# Altium PCB 012_2N3906.PcbDoc
Units mil, origin at the board's own origin, x right, y up, seen from the top; angles counter-clockwise.
Board outline 500 x 500 mil, 2 copper layers (Top Layer, Bottom Layer); 3 components, 4 nets, 17 pads, 0 vias.
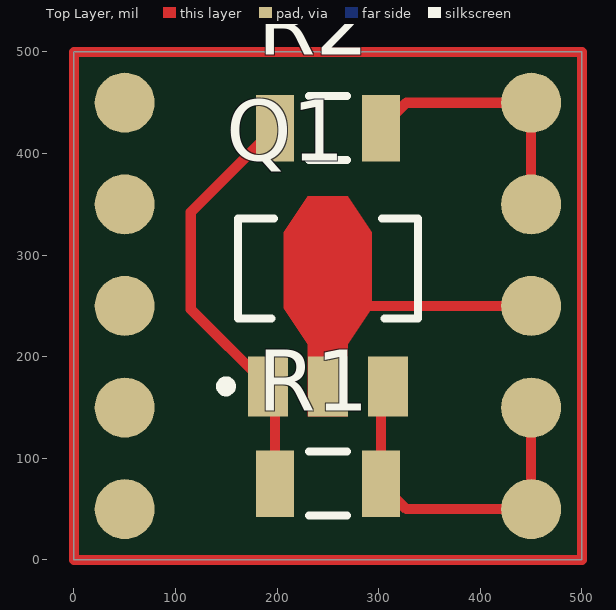
[diagram p0: Top Layer view]
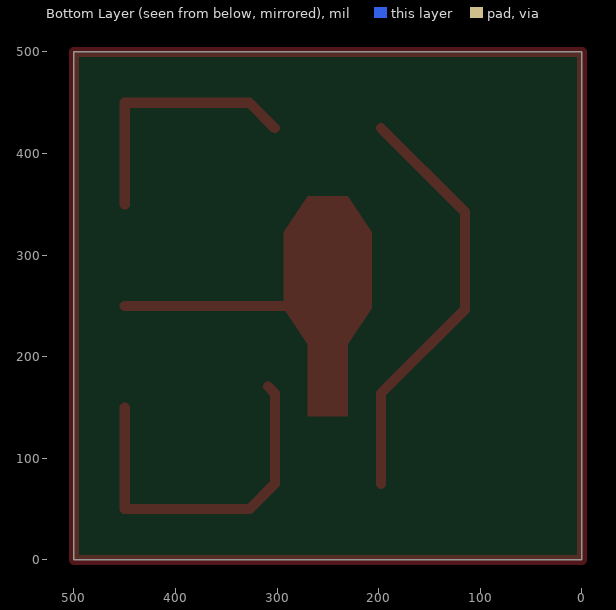
[diagram p1: Bottom Layer view, seen from below]

## Layer stack, top to bottom
Top Solder: solder mask 0.4, Solder Resist, Dk 3.5
Top Layer: signal copper 1.4
Dielectric 1: dielectric 12.6, FR-4, Dk 4.8
Bottom Layer: signal copper 1.4
Bottom Solder: solder mask 0.4, Solder Resist, Dk 3.5

## Board outline
0,0 0,500 500,500 500,0

## Design rules (kind name [scope] priority, off if disabled: settings)
Clearance [All] p1: gap=10 ignorepadtopadclearanceinfootprint=FALSE except(0: Arc-Hole Track-Hole SMDPad-Hole THPad-Hole Via-Hole Fill-Hole Poly-Hole Region-Hole Text-Hole)
PolygonConnect [All] p1: connectstyle=Relief reliefconductorwidth=10 reliefentries=4 polygonreliefangle="90 Angle" airgapwidth=10
RoomDefinition [InComponentClass('012_2N3906') vs False] p1: confinementstyle=ConfineIn formatcopy=TRUE lockcomponents=FALSE outline 0,0 500,0 500,500 0,500
RoomDefinition 012_2N3906 [InComponentClass('012_2N3906')] p2: confinementstyle=ConfineIn formatcopy=TRUE lockcomponents=FALSE outline 0,505 -65,505 0,505
RoutingVias [All] p1: holewidth=28 width=50 viastyle="Through Hole" minholewidth=28 minwidth=50 maxholewidth=28 maxwidth=50
SolderMaskExpansion [All] p1: expansion=4 istentingtop=FALSE
Width [All] p1: maxlimit=10 minlimit=10 preferedwidth=10
30 further rules are at their usual default settings.

## Components (designator, comment, footprint, x,y, rotation, side; value= is the part's Value field where it differs from the comment)
Q1 "2N3906" ONSC-SOT-89_PCP-1-3-419AU_V 250,285 r0 top
R1 "5K" FP-CRCW1206-e3-IPC_C 250,75 r180 top
R2 "5K" FP-CRCW1206-e3-IPC_C 250,425 r180 top

## Footprints (in the part's own frame and the unit in brackets; to place one, negate y for a bottom-side part, rotate by r counter-clockwise, add the part's x,y. Pads: shape width x height; smd on the part's side, far side on the other; paste and mask are expansions set on the pad)
FP-CRCW1206-e3-IPC_C [mil]
  rect 37.64x65.28 smd paste+0 mask+0: 1(-52.21,0) 2(52.21,0)
  silkscreen extent -19,-31 19,31, body extent -75,-38 75,38, height 10
ONSC-SOT-89_PCP-1-3-419AU_V [mm] "SOT89, 3-Leads, Body 4.5x2.5mm, Pitch 1.5mm"
  rect 1x1.5 smd: 1(-1.5,-2.9) 2(0,-2.9) 3(1.5,-2.9)
  Top Layer region: -0.5,-3.65 -0.5,-1.85 -1.1,-0.95 -1.1,0.95 -0.5,1.85 0.5,1.85 1.1,0.95 1.1,-0.95 0.5,-1.85 0.5,-3.65
  silkscreen extent -2.67,-3.02 2.25,1.3, body extent -2.25,-1.2 2.25,1.3, height 1.6

## Part data
Q1: library part CMP-1048-00974-1, "Bipolar Transistor, -50 V, -2 A, Low VCE(sat), PNP Single, 3-Pin SOT-89, Pb-Free, Tape and Reel", Manufacturer="On Semiconductor", PartNumber=2SB1123S-TD-E, ComponentLink1Description="Manufacturer URL", ComponentLink1URL=http://www.onsemi.com/, ComponentLink2Description=Datasheet, ComponentLink2URL=http://www.onsemi.com/pub_link/Collateral/EN1727-D.PDF, ComponentLink3Description="Package Specification", ComponentLink3URL=http://www.onsemi.com/pub_link/Collateral/ENA1087-D.PDF, IC Continuous (A)=-2, Mounting Technology="Surface Mount", PackageDescription="3-Pin Small Outline Transistor, Body 4.5 x 2.5 mm, Pitch 1.5 mm", PackageReference=SOT-89_PCP-1-3-419AU, PackageVersion="Rev. O, 04/2012", Packing="Tape and Reel", Polarity=PNP, RoHS=TRUE
R1 R2: library part CMP-2003-02034-2, "RES Thick Film, 1kΩ, 1%, 0.25W, 100ppm/°C, 1206", Case Code (Imperial)=1206, Case Code (Metric)=3216, Max Operating Temperature=155°C, Max Power Dissipation=250mW, Min Operating Temperature=-55°C, Package Quantity=10, Resistance=2.2kR, Temperature Coefficient=100ppm/°C, Tolerance=1%, Voltage Rating=200V, Case/Package=1206, Composition="Thick Film", Contact Plating=Tin, Depth=1.6mm, Features="Automotive AEC-Q200", Height=0.55mm, Lead Free="Lead Free", Length=3.2mm, Military Standard=Not, Number of Terminations=2, Packaging="Tape and Reel", Power Rating=250mW, Radiation Hardening=No, Termination=SMD/SMT, Voltage Rating (DC)=200V, Weight=0.000353oz, Width=1.6mm

## Free pads (board coordinates)
  round 59.06 smd paste+0 mask+0: 4(50,50) 4(50,150) 4(50,250) 4(50,350) 4(50,450) 4(450,50) 4(450,150) 4(450,250) 4(450,350) 4(450,450)

## Nets (pads, with @x,y where several pads share a name; then routed paths per layer and width w, separated by ;. In a path a pad name is that pad's centre, name@x,y a point inside that pad or via, vN(x,y) a via of type N, cw(c..) or ccw(c..) an arc to the next point about the centre after c; other vN are vias at no path point)
CTRL: pad.4@450,250 Q1.2 | length 214.5
  Top Layer w10: 250,285 285,250 pad.4@450,250
NetQ1_1: Q1.1 R1.2 R2.2 | length 418.6
  Top Layer w10: R1.2 197.79,163.98 Q1.1 115,246.77 115,342.21 R2.2
PWM: pad.4@450,350 pad.4@450,450 R2.1 | length 258.1
  Top Layer w10: R2.1 327.21,450 450,450 pad.4@450,350
REF: pad.4@450,50 pad.4@450,150 Q1.3 R1.1 | length 356.8
  Top Layer w10: Q1.3 302.21,163.98 R1.1 327.21,50 450,50 pad.4@450,150
copper on no net: | length 2000
  Top Layer w10: 0,0 500,0 500,500 0,500 0,0